# Altium PCB pcb.PcbDoc
Units mm, origin at the board's own origin, x right, y up, seen from the top; angles counter-clockwise.
Board outline 81.92 x 55.6 mm, 2 copper layers (Top Layer, Bottom Layer); 18 components, 20 nets, 128 pads, 0 vias.
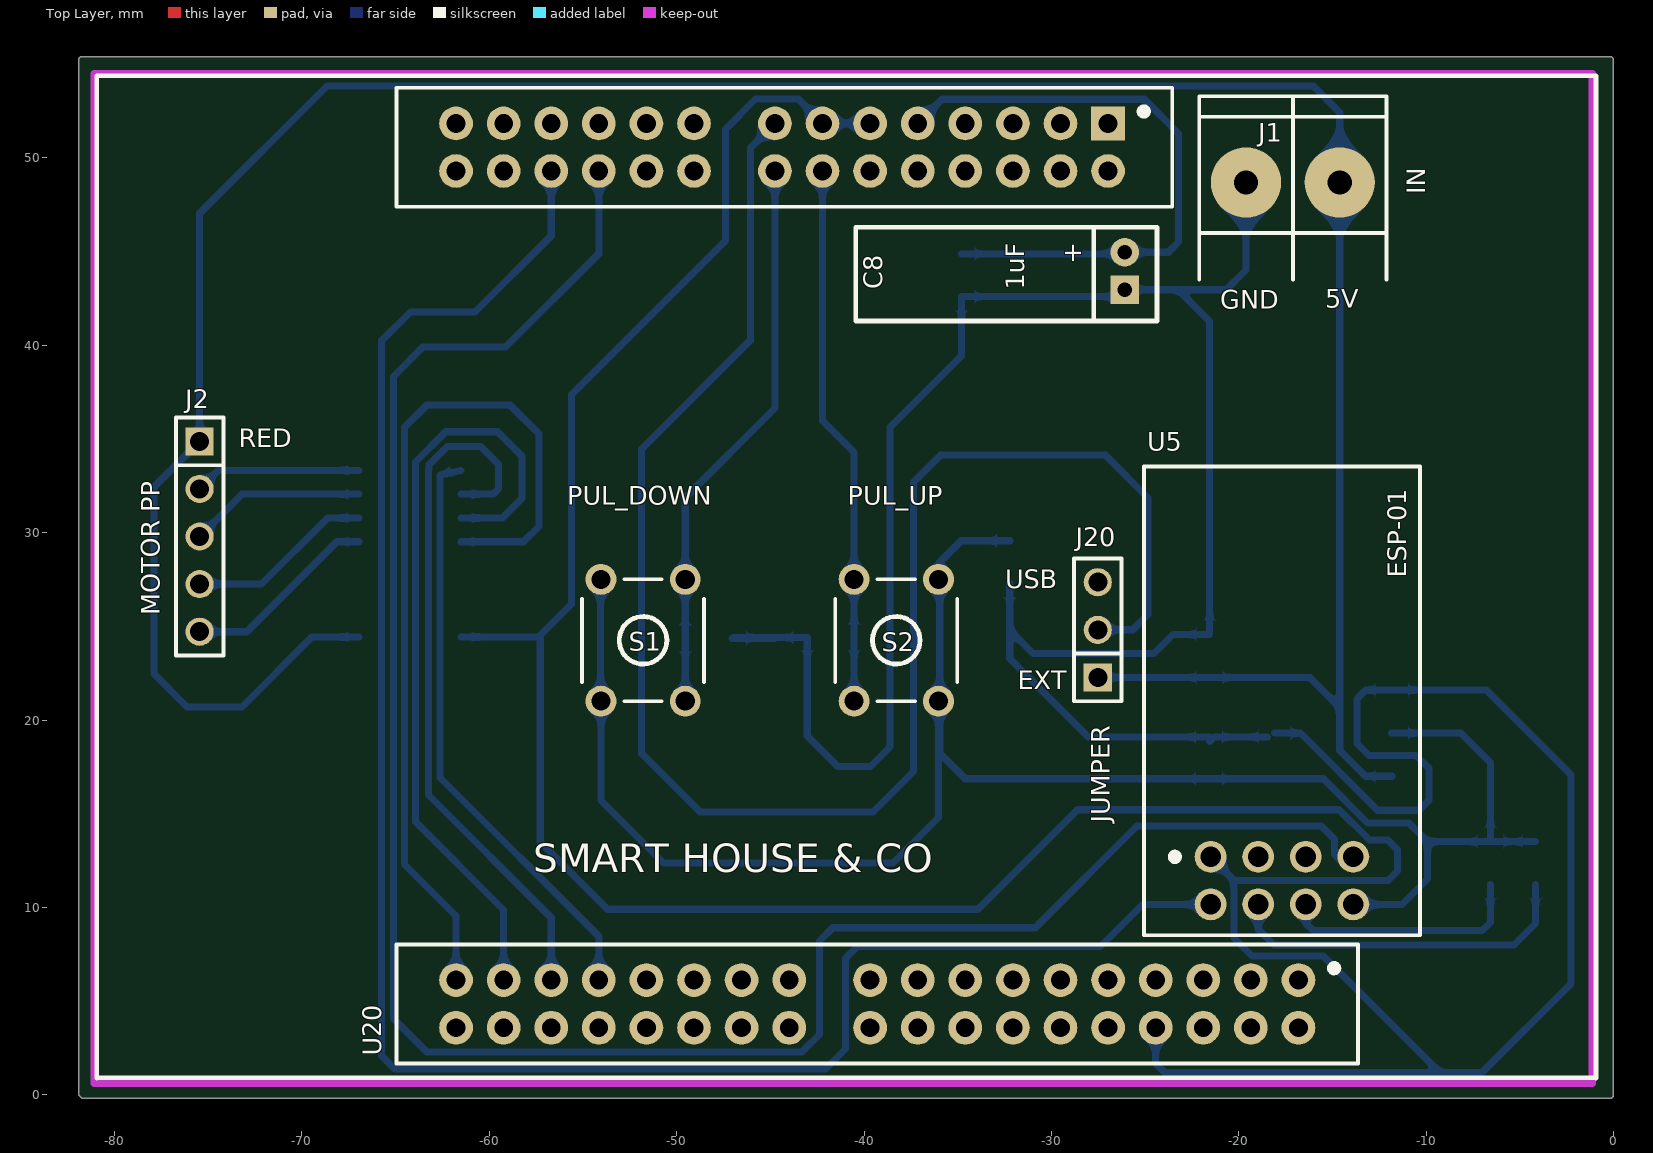
[diagram p0: Top Layer view]
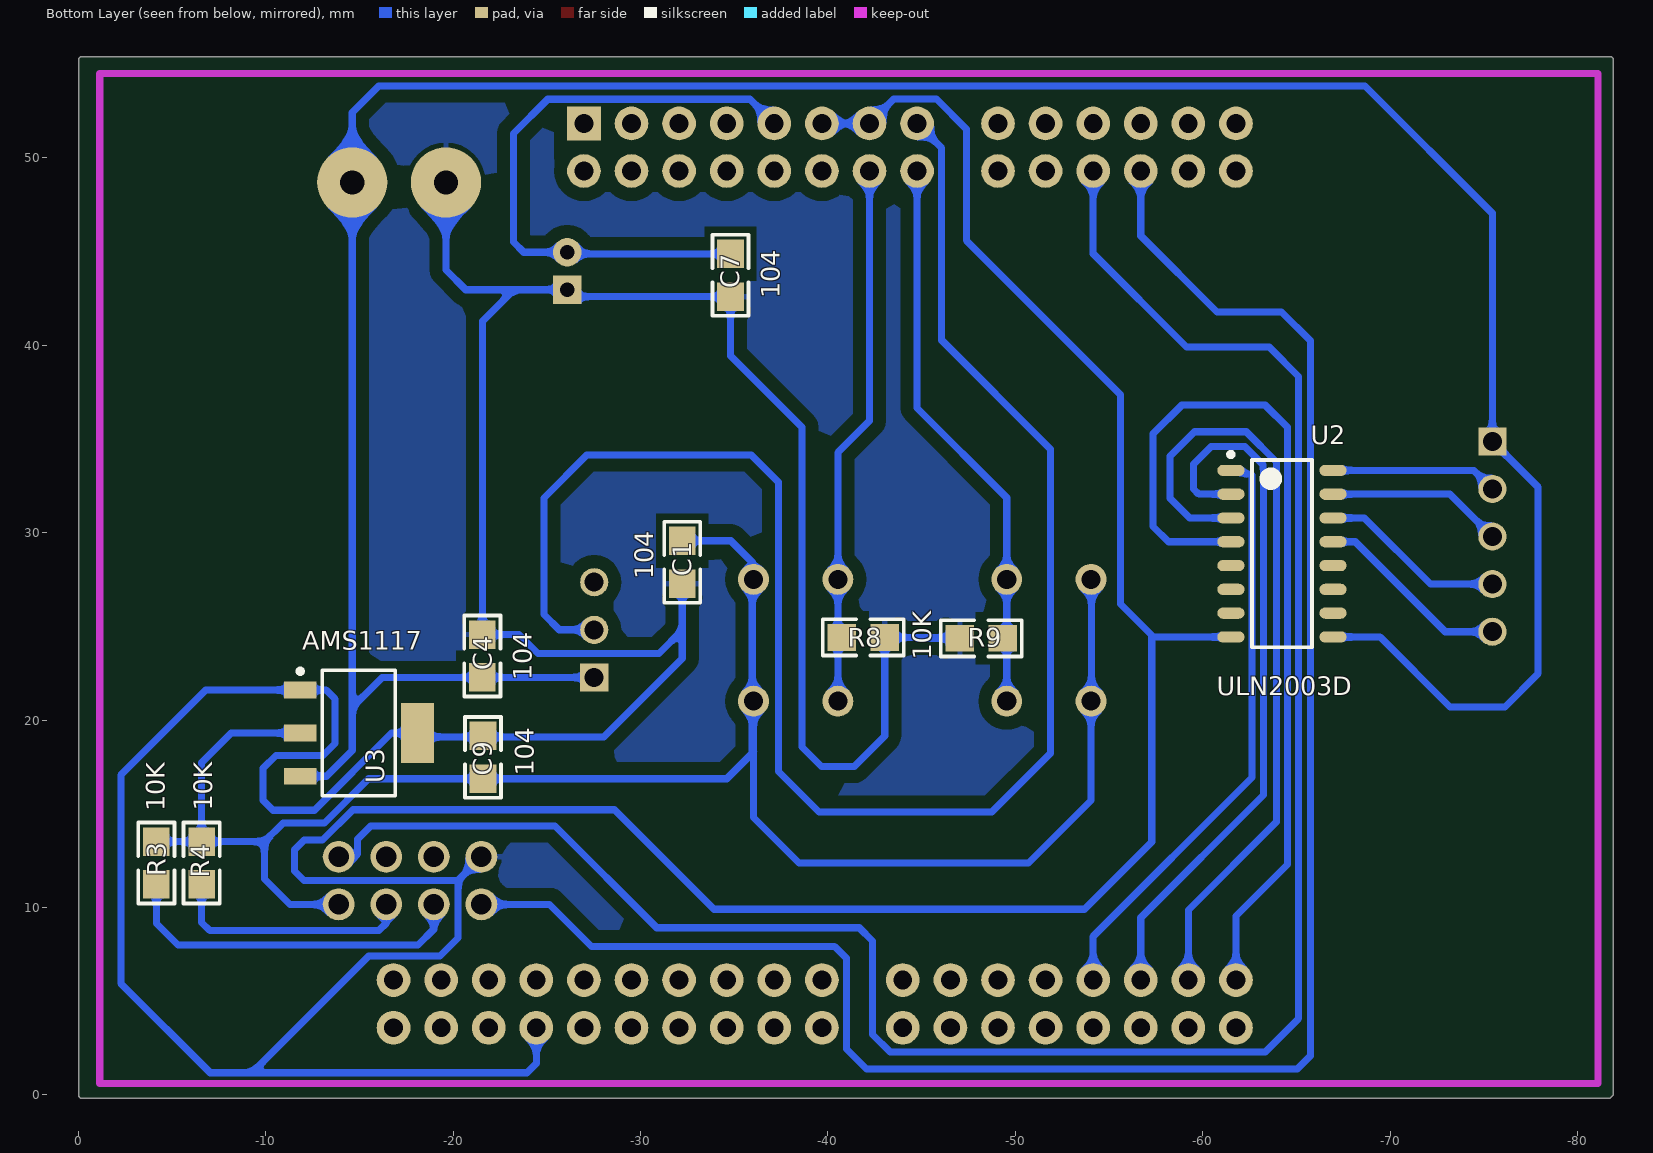
[diagram p1: Bottom Layer view, seen from below]

## Layer stack, top to bottom
Top Solder: solder mask 0.0102, Solder Resist, Dk 3.5
Top Layer: signal copper 0.0356
Dielectric 1: dielectric 0.32, FR-4, Dk 4.8
Bottom Layer: signal copper 0.0356
Bottom Solder: solder mask 0.0102, Solder Resist, Dk 3.5

## Board outline
-81.82,-0.091 cw(c-81.729,0.076) -81.92,0.076 -81.92,55.22 cw(c-81.729,55.22) -81.716,55.41 cw(c-81.703,55.22) -81.703,55.41 -0.195,55.41 cw(c-0.195,55.22) -0.004,55.22 -0.004,0 cw(c-0.195,0) -0.195,-0.191 -81.652,-0.191 cw(c-81.652,0)

## Design rules (kind name [scope] priority, off if disabled: settings)
Clearance POLYGON [All vs InPolygon] p1: gap=0.7
Clearance [All] p2: gap=0.2
PolygonConnect [All] p1: connectstyle=Relief reliefconductorwidth=0.254 reliefentries=4 polygonreliefangle="90 Angle" airgapwidth=0.254
RoutingVias [All] p1: holewidth=0.711 width=1.27 viastyle="Through Hole" minholewidth=0.711 minwidth=1.27 maxholewidth=0.711 maxwidth=1.27
SolderMaskExpansion [All] p1: expansion=0.102
UnpouredPolygon [All] p1: allowunpoured=FALSE
Width [All] p1: maxlimit=2 minlimit=0.254 preferedwidth=0.381 toplayer_maxwidth=0.508 minimp=50.000000 maximp=50.000000 favimp=50.000000
29 further rules are at their usual default settings.

## Components (designator, comment, footprint, x,y, rotation, side; value= is the part's Value field where it differs from the comment)
C1 "104" 0805 -32.224,28.423 r90 bottom
C4 "104" 0805 -21.556,23.419 r90 bottom
C7 "104" 0805 -34.798,43.739 r90 bottom
C8 "1uF" CAP100RP -26.086,43.967 r270 top
C9 "104" 0805 -21.59,18.009 r90 bottom
J1 "IN" BORNERA2 -17.111,48.692 r270 top
J2 "MOTOR PP" SIP5 -75.455,34.874 r270 top
J20 "JUMPER" JUMPER3 -27.525,24.816 r90 top
R3 "10K" 0805 -4.157,12.37 r270 bottom
R4 "10K" 0805 -6.57,12.37 r270 bottom
R8 "10K" 0805 -41.885,24.409 r0 bottom
R9 "" 0805 -48.184,24.359 r180 bottom
S1 "PUL_DOWN" TACTSWITCH -51.791,24.257 r180 top
S2 "PUL_UP" TACTSWITCH -38.278,24.257 r0 top
U2 "ULN2003D" SOIC16 -64.228,28.88 r180 bottom
U3 "AMS1117" AMS1117 -14.961,19.304 r180 bottom
U5 "ESP-01" ESP-01 -21.505,10.16 r0 top
U20 "FRDM-KL25Z" MICRO -40.818,28.6 r180 top

## Footprints (in the part's own frame and the unit in brackets; to place one, negate y for a bottom-side part, rotate by r counter-clockwise, add the part's x,y. Pads: shape width x height; smd on the part's side, far side on the other; paste and mask are expansions set on the pad)
0805 [mil] "Pasivo 0805"
  rect 60x56 smd: 1(-45,0) 2(45,0)
  silkscreen extent -85,-38 85,38, body extent -40,-25 39,25, height 15
AMS1117 [mm] "SOT223, 4-Leads, Body 6,50x7,00mm (avg), Pitch 2,30mm, IPC Medium Density"
  rect 1.75x0.9 smd: 1(-3.125,-2.3) 2(-3.125,2.3) 3(-3.125,0)
  rect 1.75x3.2 smd: 2(3.125,0)
  silkscreen extent -3.25,-3.35 1.95,3.42, body extent -3.48,-3.25 3.48,3.25, height 1.7
BORNERA2 [mm] "Bornera con Tornillos 5mm separaci�n"
  round 3.75 hole 1.3: 1(0,2.5) 2(0,-2.5)
  silkscreen extent -4.6,-5 5.2,5, body extent -3.76,-4.89 3.94,5.61, height 10
CAP100RP [mil] "Body diameter 5mm"
  round 60 hole 30: 1(-39.37,0)
  rect 60x60 hole 30: 2(39.37,0)
  silkscreen extent -92,-565 105,68, body extent -97,-566 107,-65, height 220
ESP-01 [mm]
  round 1.7 hole 1.1: 1(0,2.54) 2(2.54,2.54) 3(5.08,2.54) 4(7.62,2.54) 5(0,0) 6(2.54,0) 7(5.08,0) 8(7.62,0)
  silkscreen extent -3.56,-1.65 11.18,23.37, body extent -3.43,-1.52 11.07,23.28, height 14.88
JUMPER3 [mm]
  rect 1.5x1.5 hole 1.016: 1(-2.54,0)
  round 1.5 hole 1.016: 2(0,0) 3(2.54,0)
  silkscreen extent -3.81,-1.27 3.81,1.27, body extent -3.81,-1.3 3.81,1.27, height 16.15
MICRO [mm]
  rect 1.8x1.8 hole 1: 1(-13.843,-23.241)
  round 1.8 hole 1: 2(-13.843,-20.701) 3(-11.303,-23.241) 4(-11.303,-20.701) 5(-8.763,-23.241) 6(-8.763,-20.701) 7(-6.223,-23.241) 8(-6.223,-20.701) 9(-3.683,-23.241) 10(-3.683,-20.701) 11(-1.143,-23.241) 12(-1.143,-20.701) 13(1.397,-23.241) 14(1.397,-20.701) 15(3.937,-23.241) 16(3.937,-20.701) 17(8.255,-23.241) 18(8.255,-20.701) 19(10.795,-23.241) 20(10.795,-20.701) 21(13.335,-23.241) 22(13.335,-20.701) 23(15.875,-23.241) 24(15.875,-20.701) 25(18.415,-23.241) 26(18.415,-20.701) 27(20.955,-23.241) 28(20.955,-20.701) 29(-24.003,22.479) 30(-24.003,25.019) 31(-21.463,22.479) 32(-21.463,25.019) 33(-18.923,22.479) 34(-18.923,25.019) 35(-16.383,22.479) 36(-16.383,25.019) 37(-13.843,22.479) 38(-13.843,25.019) 39(-11.303,22.479) 40(-11.303,25.019) 41(-8.763,22.479) 42(-8.763,25.019) 43(-6.223,22.479) 44(-6.223,25.019) 45(-3.683,22.479) 46(-3.683,25.019) 47(-1.143,22.479) 48(-1.143,25.019) 49(3.175,22.479) 50(3.175,25.019) 51(5.715,22.479) 52(5.715,25.019) 53(8.255,22.479) 54(8.255,25.019) 55(10.795,22.479) 56(10.795,25.019) 57(13.335,22.479) 58(13.335,25.019) 59(15.875,22.479) 60(15.875,25.019) 61(18.415,22.479) 62(18.415,25.019) 63(20.955,22.479) 64(20.955,25.019)
  silkscreen extent -39.88,-25.78 40.13,27.72, body extent -25.27,-24.51 22.22,26.29, height 1.5
SIP5 [mm]
  rect 1.5x1.5 hole 1.016: 1(0,0)
  round 1.5 hole 1.016: 2(2.54,0) 3(5.08,0) 4(7.62,0) 5(10.16,0)
  silkscreen extent -1.27,-1.27 11.43,1.27, body extent -1.27,-1.27 11.43,1.27, height 8.38
SOIC16 [mm] "controlador de corriente"
  oval 1.45x0.6 smd: 1(-2.725,4.445) 2(-2.725,3.175) 3(-2.725,1.905) 4(-2.725,0.635) 5(-2.725,-0.635) 6(-2.725,-1.905) 7(-2.725,-3.175) 8(-2.725,-4.445) 9(2.725,-4.445) 10(2.725,-3.175) 11(2.725,-1.905) 12(2.725,-0.635) 13(2.725,0.635) 14(2.725,1.905) 15(2.725,3.175) 16(2.725,4.445)
  silkscreen extent -2.85,-5 1.6,5.42, body extent -2,-5 2,5, height 1.75
TACTSWITCH [mil]
  round 65 hole 40: 1(-88.58,-127.95) 2(-88.58,127.95) 3(88.58,-127.95) 4(88.58,127.95)
  silkscreen extent -128,-128 128,128, body extent -120,-156 124,156, height 276

## Part data
C1 C4 C7 C9: library part CAP, "cap"
C8: library part CAPPOL, "Cap polarizado"
J1: library part Bornera_2, "Bornera de 2 pines"
J2: library part CON5
J20: library part JUMPER3
R3 R4 R8 R9: library part RES, "Resistencia"
S1 S2: library part "TACT SWITCH"
U2: "Controlador de corriente"

## Nets (pads, with @x,y where several pads share a name; then routed paths per layer and width w, separated by ;. In a path a pad name is that pad's centre, name@x,y a point inside that pad or via, vN(x,y) a via of type N, cw(c..) or ccw(c..) an arc to the next point about the centre after c; other vN are vias at no path point)
3V3: C1.2 C9.1 R3.1 R4.1 S1.3 S1.4 S2.3 S2.4 U3.3 U5.8 | length 103.4
  Bottom Layer w0.381: S1.4@-54.057,20.98 S1.3@-54.057,27.583 ; S1.4 -54.041,15.712 -50.698,12.37 -38.456,12.37 -36.028,14.798 -36.028,18.296 ; S2.3 -36.028,18.296 ; C1.2 -34.815,29.566 -35.958,28.423 -35.958,18.226 ; U5.8 -11.294,10.16 -9.931,11.523 -9.931,13.513 ; U3.3 -8.153,19.304 -6.57,17.721 R4.1 ; R3.1 R4.1 ; -36.028,18.296 -35.958,18.226 ; -35.958,18.226 -34.597,16.866 C9.1 -15.475,16.866 -13.122,14.513 -10.932,14.513 -9.931,13.513 ; -9.931,13.513 R4.1
5V: C4.1 J1.1 J2.1 J20.1 U2.9 U3.1 | length 154
  Bottom Layer w0.381: U2.9 -69.469,24.435 -73.203,20.701 -76.124,20.701 -77.902,22.479 -77.902,32.427 J2.1 -75.455,47.049 -68.662,53.842 -16.021,53.842 -14.611,52.432 J1.1 -14.611,20.676 ; J20.1 C4.1 -16.211,22.276 -14.611,20.676 ; U3.1 -13.245,17.004 -14.611,18.37 -14.611,20.676
GND: C1.1 C4.2 C7.1 C8.2 C9.2 J1.2 R8.1 R9.1 U2.8 U3.2 U5.1 U20.11 U20.13 U20.36 | length 317.4
  Bottom Layer w0.381: U2.8 -57.379,24.435 -55.617,26.196 -55.617,37.363 -47.396,45.584 -47.396,51.528 -45.788,53.137 -43.51,53.137 U20.13 U20.11 ; -57.277,24.435 -57.277,13.487 -53.696,9.906 -33.909,9.906 -28.6,15.215 -14.646,15.215 -13.025,13.594 -12.045,13.594 -11.532,13.081 -11.532,11.938 -12.04,11.43 -20.235,11.43 -20.261,11.455 ; -44.755,24.359 R9.1 -46.99,24.409 R8.1 -43.028,19.152 -41.402,17.526 -39.649,17.526 -38.608,18.567 -38.608,35.628 -34.798,39.438 C7.1 -26.457,42.596 C8.2 -23.241,42.967 ; C1.1 -32.224,24.79 ; U20.36 -24.435,1.676 -23.934,1.176 -9.253,1.176 ; C9.2@-21.556,18.847 -21.302,19.101 U3.2@-18.458,19.101 ; C9.2@-21.556,19.101 -28.033,19.101 -32.224,23.292 -32.224,24.79 ; U5.1 -20.261,11.455 ; J1.2 -19.611,44.023 -20.667,42.967 -23.241,42.967 ; U3.2@-18.086,19.304 -16.713,19.304 -12.598,15.189 -10.389,15.189 -9.855,15.723 -9.855,17.424 -10.541,18.11 -13.056,18.11 -13.691,18.745 -13.691,21.133 -13.219,21.604 -11.836,21.604 -6.796,21.604 -2.261,17.069 -2.261,5.944 -7.029,1.176 -9.253,1.176 ; -32.224,24.79 -30.979,23.546 -24.528,23.546 -23.512,24.562 C4.2 -21.556,41.282 -23.241,42.967 ; -20.261,11.455 -20.261,8.373 -19.299,7.412 -15.489,7.412 -9.253,1.176
NetC7_2: C7.2 C8.1 U20.9 | length 32.8
  Bottom Layer w0.381: U20.9 -35.844,53.132 -25.04,53.132 -23.216,51.308 -23.216,45.517 -23.765,44.967 C8.1 -26.171,44.882 C7.2
NetJ2_2: J2.2 U2.16 | length 8.9
  Bottom Layer w0.381: J2.2 -74.464,33.325 U2.16
NetJ2_3: J2.3 U2.15 | length 9.4
  Bottom Layer w0.381: J2.3 -73.194,32.055 U2.15
NetJ2_4: J2.4 U2.14 | length 10
  Bottom Layer w0.381: J2.4 -72.153,27.254 -68.622,30.785 U2.14
NetJ2_5: J2.5 U2.13 | length 10.5
  Bottom Layer w0.381: J2.5 -72.94,24.714 -68.14,29.515 U2.13
NetR3_2: R3.2 U5.6 | length 19
  Bottom Layer w0.381: U5.6 -18.965,8.831 -18.128,7.993 -5.309,7.993 -4.157,9.144 R3.2
NetR4_2: R4.2 U5.7 | length 13.2
  Bottom Layer w0.381: U5.7 -16.425,9.161 -16.027,8.763 -7.01,8.763 -6.57,9.203 R4.2
NetR8_2: R8.2 S2.1 S2.2 U20.14 | length 29
  Bottom Layer w0.381: U20.14 -42.215,35.975 -40.911,34.671 -40.528,34.288 S2.2 S2.1
NetR9_2: R9.2 S1.1 S1.2 U20.16 | length 30.3
  Bottom Layer w0.381: S1.2 S1.1 -49.541,31.866 -44.755,36.652 U20.16
NetU2_1: U2.1 U20.57 | length 31.6
  Bottom Layer w0.381: U2.1 -62.628,33.071 -62.628,16.933 -54.153,8.458 U20.57
NetU2_2: U2.2 U20.59 | length 38.2
  Bottom Layer w0.381: U2.2 -59.792,32.055 -59.512,32.334 -59.512,33.655 -60.452,34.595 -62.247,34.595 -63.212,33.63 -63.212,33.41 -63.246,33.376 -63.246,16.002 -56.693,9.449 U20.59
NetU2_3: U2.3 U20.61 | length 42.4
  Bottom Layer w0.381: U2.3 -59.309,30.785 -58.259,31.835 -58.259,34.081 -59.563,35.385 -62.323,35.385 -63.939,33.769 -63.939,14.57 -59.233,9.864 U20.61
NetU2_4: U2.4 U20.63 | length 48.4
  Bottom Layer w0.381: U20.63 -61.773,9.55 -64.52,12.298 -64.52,35.623 -63.339,36.805 -58.877,36.805 -57.353,35.281 -57.353,30.328 -58.166,29.515 U2.4
RXD: U5.4 U20.22 | length 113.4
  Bottom Layer w0.381: U20.22 -54.153,44.882 -59.131,39.903 -63.551,39.903 -65.117,38.337 -65.117,4.064 -63.339,2.286 -43.324,2.286 -42.384,3.226 -42.384,8.204 -41.673,8.915 -30.861,8.915 -25.425,14.351 -15.596,14.351 -14.884,13.64 -14.884,12.852 -14.732,12.7 U5.4
TXD: U5.5 U20.24 | length 104
  Bottom Layer w0.381: U20.24 -56.693,45.847 -60.757,41.783 -64.211,41.783 -65.752,40.242 -65.752,2.083 -65.041,1.372 -42.054,1.372 -40.987,2.438 -40.987,7.29 -40.356,7.921 -27.385,7.921 -25.146,10.16 U5.5
USB: J20.3
VDD: J20.2 U20.15 | length 92
  Bottom Layer w0.381: U20.15 -46.067,50.529 -46.067,40.268 -51.867,34.468 -51.867,18.212 -48.743,15.088 -39.514,15.088 -37.355,17.247 -37.355,32.69 -35.907,34.138 -27.127,34.138 -24.841,31.852 -24.841,25.629 -25.654,24.816 J20.2
pads on no net: U2.5 U2.6 U2.7 U2.10 U2.11 U2.12 U5.2 U5.3 U20.1 U20.2 U20.3 U20.4 U20.5 U20.6 U20.7 U20.8 U20.10 U20.12 U20.17 U20.18 U20.19 U20.20 U20.21 U20.23 U20.25 U20.26 U20.27 U20.28 U20.29 U20.30 U20.31 U20.32 U20.33 U20.34 U20.35 U20.37 U20.38 U20.39 U20.40 U20.41 U20.42 U20.43 U20.44 U20.45 U20.46 U20.47 U20.48 U20.49 U20.50 U20.51 U20.52 U20.53 U20.54 U20.55 U20.56 U20.58 U20.60 U20.62 U20.64

## Polygon pours and split planes (outlines as drawn)
GND on Bottom Layer "POLYGON" (solid, remove dead copper, pour order 3): -86.055,57.76 -85.979,57.836 0.762,57.836 0.762,-2.286 0.61,-2.438 0.279,-2.108 -84.049,-2.108

## Keep-outs
Keep-Out Layer:
  lines w0.381: -81.102,0.595 -81.102,54.508 -1.134,54.508 -1.134,0.595 -81.051,0.595

## Silkscreen, mask and mechanical layers (free items; w line width, h text height)
Top Overlay:
  text "5V" at -15.392,42.012 h1
  text "GND" at -20.98,41.961 h1
  text "RED" at -73.372,34.569 h1
  text "USB" at -32.453,27.026 h1
  text "EXT" at -31.792,21.641 h1
  text "SMART HOUSE & CO" at -57.658,11.887 h1.52
Mechanical 32:
  lines w0.381: -81.729,55.22 -81.729,-0.193 -0.195,-0.193 -0.195,55.22 -81.703,55.22

## Text inside footprints (layer, text, board x,y; h text height)
C8: Top Overlay "+" at -29.261,45.491 h1.02 r270